# Altium PCB mu100-dit.PcbDoc
Units mm, origin at the board's own origin, x right, y up, seen from the top; angles counter-clockwise.
Board outline 17.9 x 40 mm, 4 copper layers (F.Cu, In1.Cu, In2.Cu, B.Cu); 22 components, 24 nets, 80 pads, 30 vias.
Unrouted connection lines stored in the file: 3.
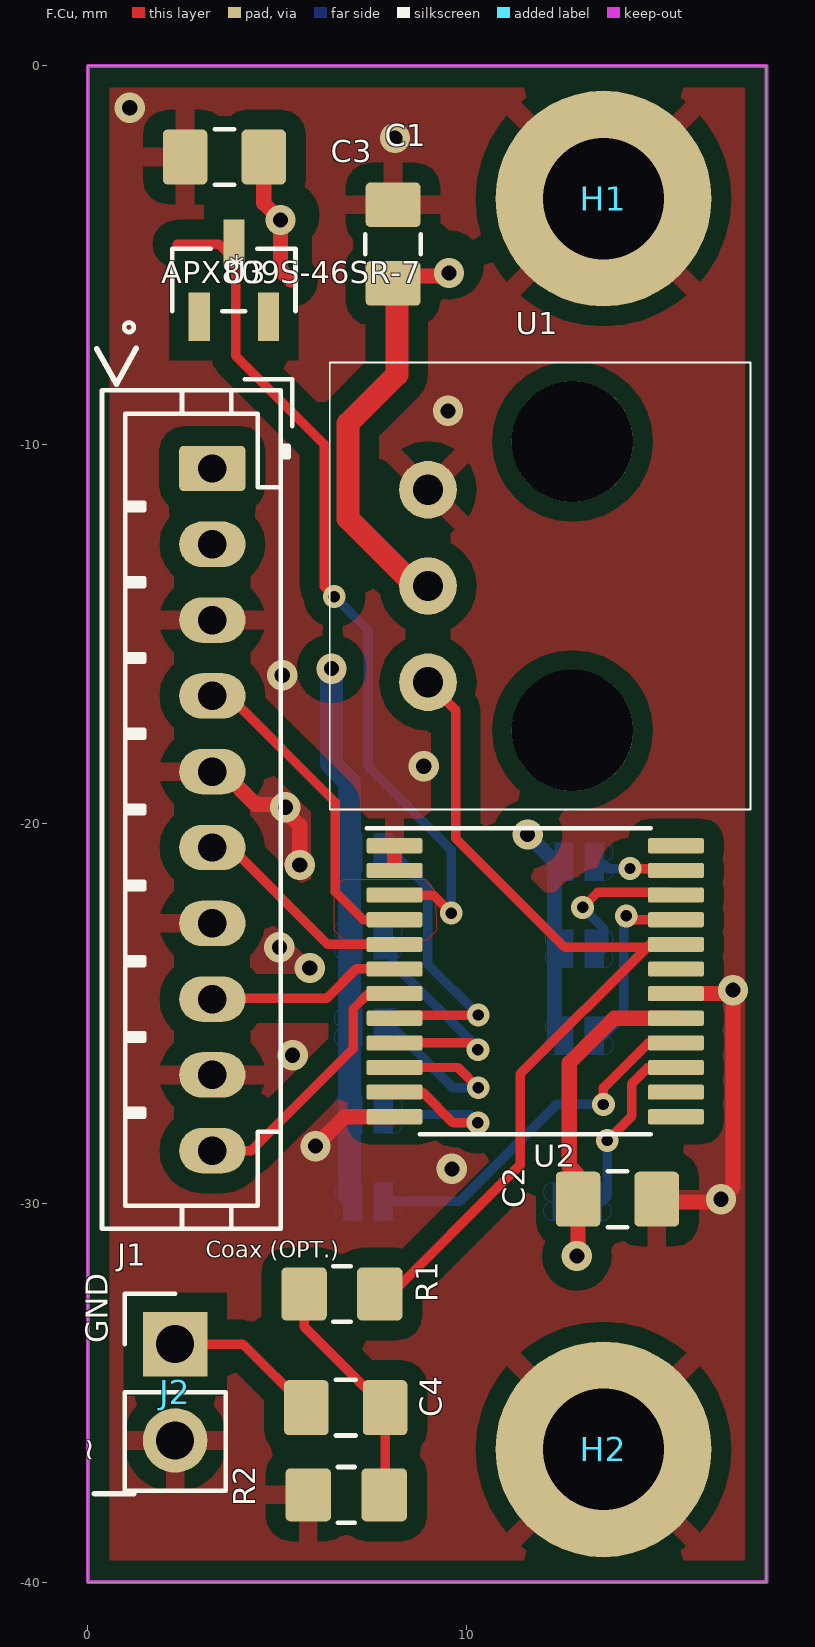
[diagram p0: F.Cu view]
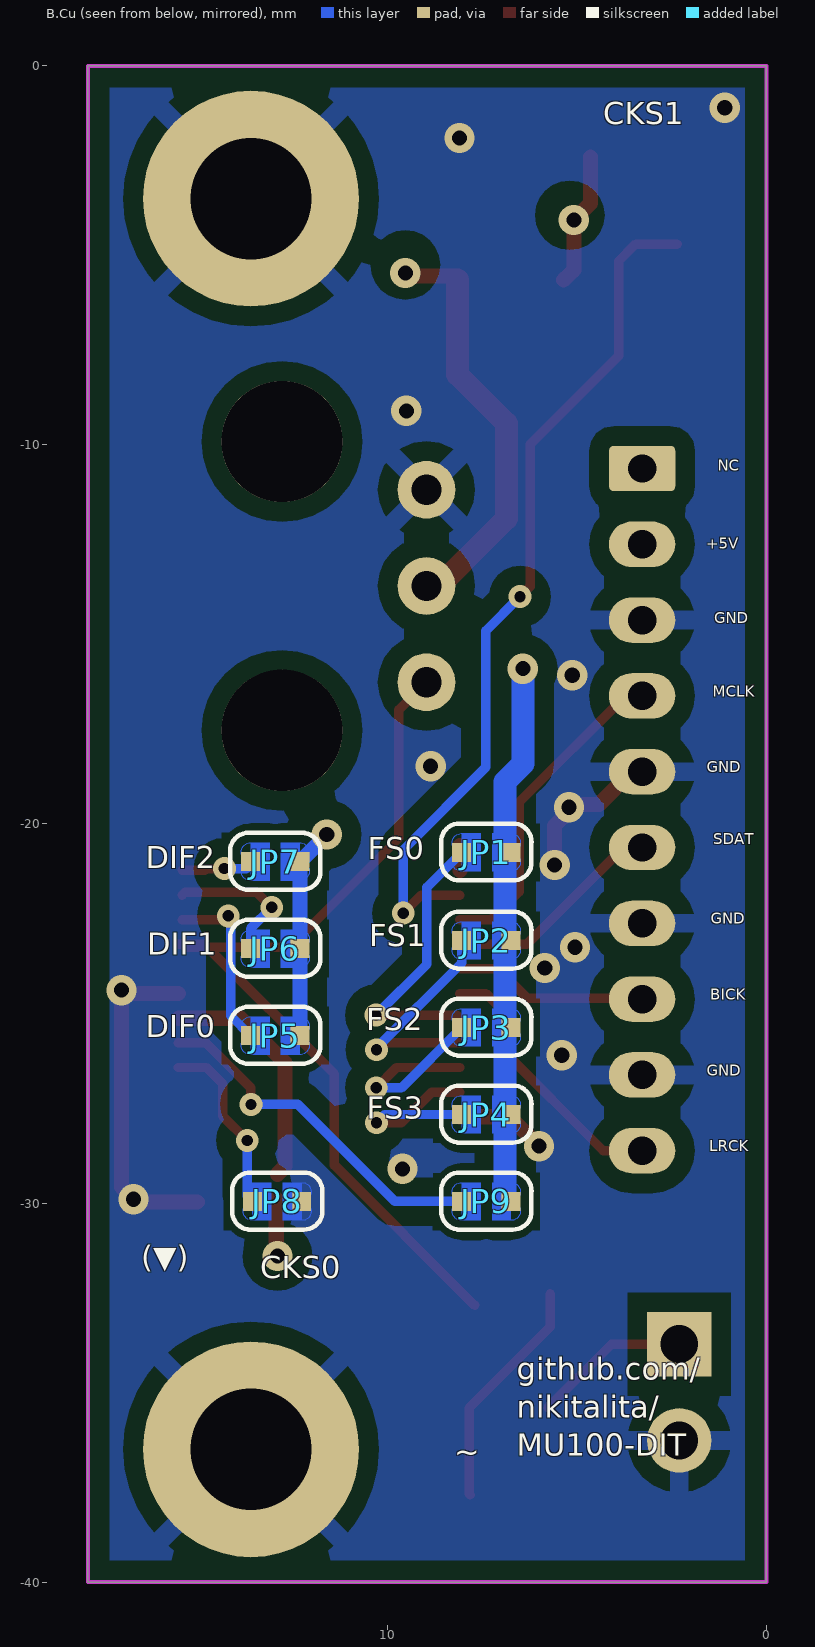
[diagram p1: B.Cu view, seen from below]
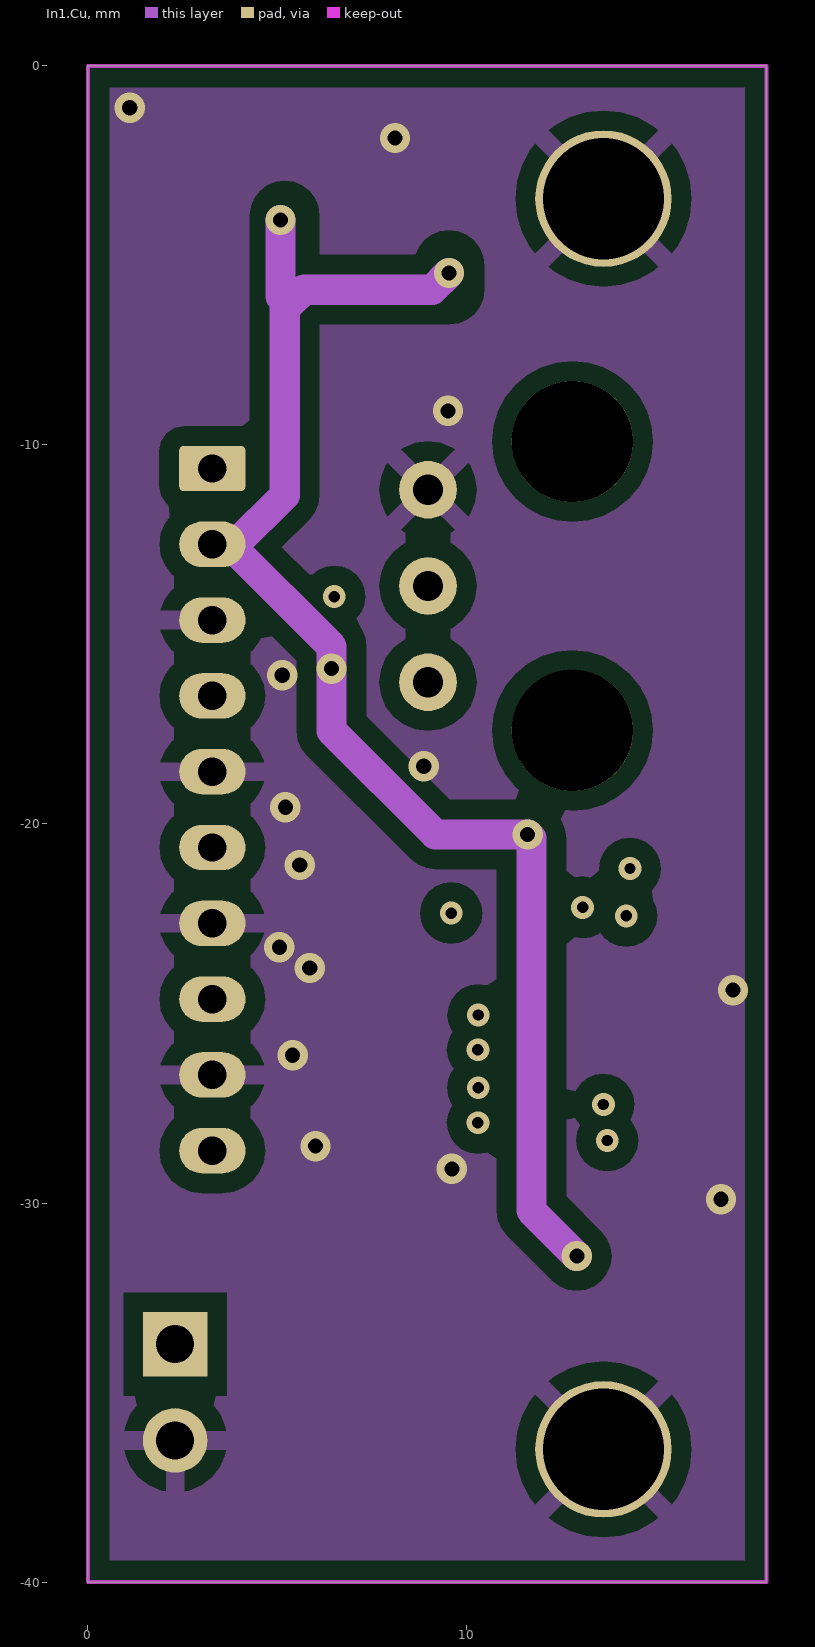
[diagram p2: In1.Cu]
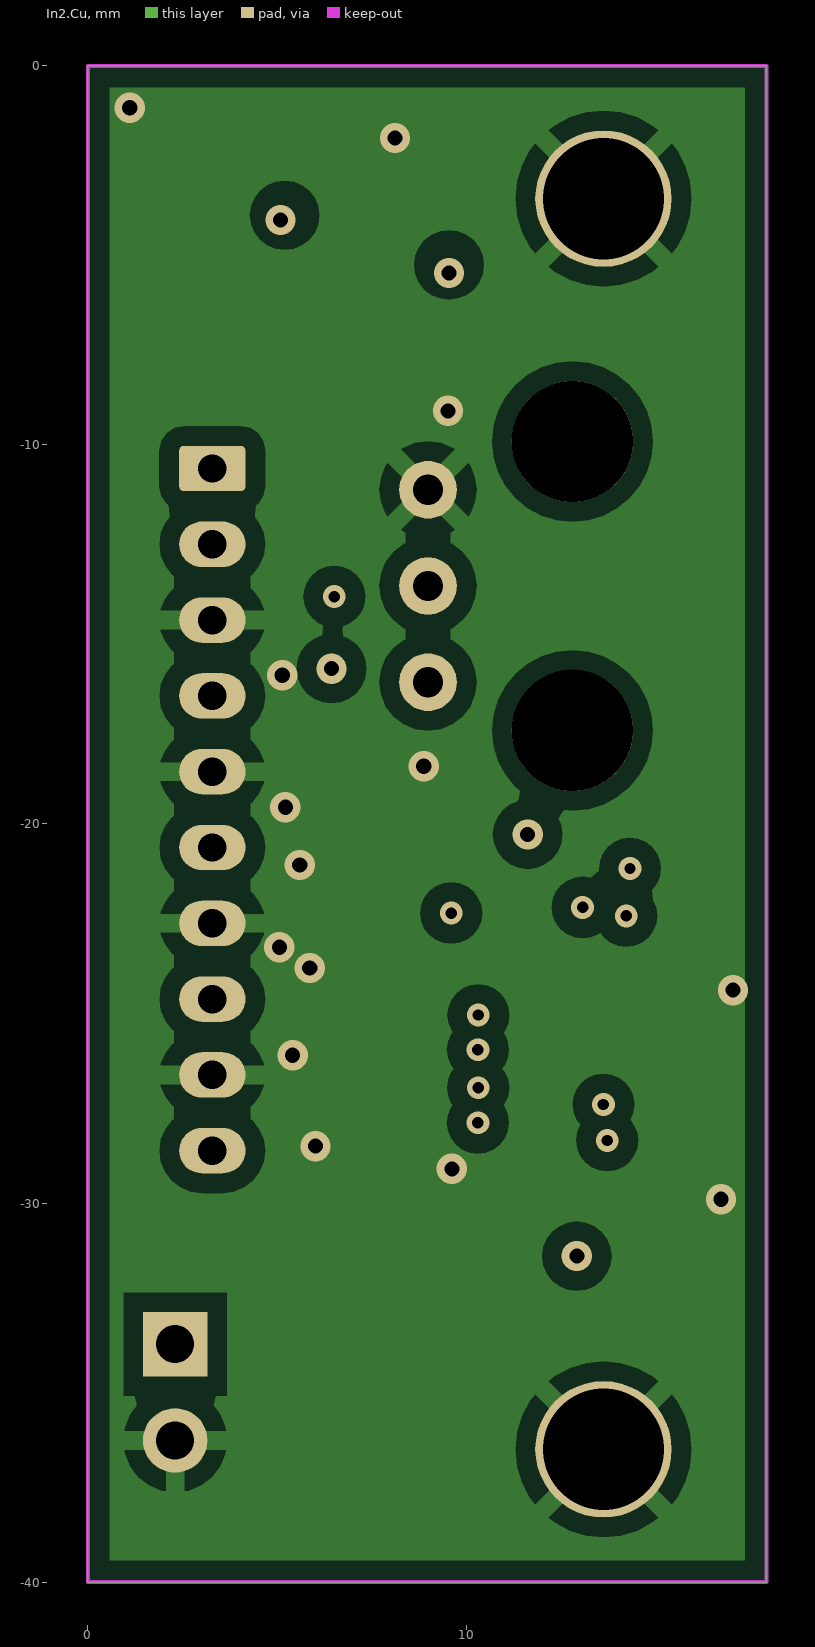
[diagram p3: In2.Cu]

## Layer stack, top to bottom
F.Mask: solder mask 0.0102, Solder Resist, Dk 3.5
F.Cu: signal copper 0.0356
Dielectric 1: dielectric 0.32, FR-4, Dk 4.8
In1.Cu: signal copper 0.0356
Dielectric2: dielectric 0.32, FR-4, Dk 4.8
In2.Cu: signal copper 0.0356
Dielectric3: dielectric 0.32, FR-4, Dk 4.8
B.Cu: signal copper 0.0356
B.Mask: solder mask 0.0102, Solder Resist, Dk 3.5

## Board outline
0,0 0,-40 17.9,-40 17.9,0 0,0

## Design rules (kind name [scope] priority, off if disabled: settings)
Clearance [IsTrack vs IsTrack] p1: gap=0.2 ignorepadtopadclearanceinfootprint=FALSE
Clearance "Clearence 0.5_Polygon" [InNamedPolygon('F.Cu-GND') OR InNamedPolygon('F.Cu-GND-1') OR InNamedPolygon('In1.Cu-GND') OR InNamedPolygon('In2.Cu-GND') OR InNamedPolygon('B.Cu-GND') OR InNamedPolygon('B.Cu-GND-1')] p2: gap=0.5 ignorepadtopadclearanceinfootprint=FALSE
Clearance "Clearence 0.5_PadClass" [InPadClass('Pad Class Clearance 0.5')] p3: gap=0.5 ignorepadtopadclearanceinfootprint=FALSE
Clearance "Clearence 0.2_PadClass" [InPadClass('Pad Class Clearance 0.15')] p4: gap=0.2 ignorepadtopadclearanceinfootprint=FALSE
DiffPairsRouting [All] p1: maxlimit=0.25 minlimit=0.127 mostfreqgap=0.25 toplayer_minwidth=0.127 toplayer_maxwidth=0.4 toplayer_prefwidth=0.25 midlayer1_minwidth=0.127 midlayer1_maxwidth=0.4 midlayer1_prefwidth=0.25 midlayer2_minwidth=0.127 midlayer2_maxwidth=0.4 midlayer2_prefwidth=0.25 bottomlayer_minwidth=0.127 bottomlayer_maxwidth=0.4 bottomlayer_prefwidth=0.25 maxuncoupledlength=12.7
MinimumSolderMaskSliver [All] p1: minsoldermaskwidth=0
PolygonConnect Polygon_B.Cu-GND-1_ConnectDirect [IsNamedPolygon('B.Cu-GND-1') vs IsVia] p1: connectstyle=Direct reliefconductorwidth=0.254 reliefentries=4 polygonreliefangle="90 Angle" airgapwidth=0.254
PolygonConnect Polygon_B.Cu-GND-1_ConnectRelief45 [IsNamedPolygon('B.Cu-GND-1') vs (IsThruPin or IsSMTPin) and (PadShape_AllLayers = 'Round')] p2: connectstyle=Relief reliefconductorwidth=0.508 reliefentries=4 polygonreliefangle="45 Angle" airgapwidth=0.508
PolygonConnect Polygon_B.Cu-GND-1_ConnectRelief90 [IsNamedPolygon('B.Cu-GND-1') vs (IsThruPin or IsSMTPin) and (PadShape_AllLayers <> 'Round')] p3: connectstyle=Relief reliefconductorwidth=0.508 reliefentries=4 polygonreliefangle="90 Angle" airgapwidth=0.508
PolygonConnect Polygon_B.Cu-GND_ConnectDirect [IsNamedPolygon('B.Cu-GND') vs IsVia] p4: connectstyle=Direct reliefconductorwidth=0.254 reliefentries=4 polygonreliefangle="90 Angle" airgapwidth=0.254
PolygonConnect Polygon_B.Cu-GND_ConnectRelief45 [IsNamedPolygon('B.Cu-GND') vs (IsThruPin or IsSMTPin) and (PadShape_AllLayers = 'Round')] p5: connectstyle=Relief reliefconductorwidth=0.508 reliefentries=4 polygonreliefangle="45 Angle" airgapwidth=0.508
PolygonConnect Polygon_B.Cu-GND_ConnectRelief90 [IsNamedPolygon('B.Cu-GND') vs (IsThruPin or IsSMTPin) and (PadShape_AllLayers <> 'Round')] p6: connectstyle=Relief reliefconductorwidth=0.508 reliefentries=4 polygonreliefangle="90 Angle" airgapwidth=0.508
PolygonConnect Polygon_In2.Cu-GND_ConnectDirect [IsNamedPolygon('In2.Cu-GND') vs IsVia] p7: connectstyle=Direct reliefconductorwidth=0.254 reliefentries=4 polygonreliefangle="90 Angle" airgapwidth=0.254
PolygonConnect Polygon_In2.Cu-GND_ConnectRelief45 [IsNamedPolygon('In2.Cu-GND') vs (IsThruPin or IsSMTPin) and (PadShape_AllLayers = 'Round')] p8: connectstyle=Relief reliefconductorwidth=0.508 reliefentries=4 polygonreliefangle="45 Angle" airgapwidth=0.508
PolygonConnect Polygon_In2.Cu-GND_ConnectRelief90 [IsNamedPolygon('In2.Cu-GND') vs (IsThruPin or IsSMTPin) and (PadShape_AllLayers <> 'Round')] p9: connectstyle=Relief reliefconductorwidth=0.508 reliefentries=4 polygonreliefangle="90 Angle" airgapwidth=0.508
PolygonConnect Polygon_In1.Cu-GND_ConnectDirect [IsNamedPolygon('In1.Cu-GND') vs IsVia] p10: connectstyle=Direct reliefconductorwidth=0.254 reliefentries=4 polygonreliefangle="90 Angle" airgapwidth=0.254
PolygonConnect Polygon_In1.Cu-GND_ConnectRelief45 [IsNamedPolygon('In1.Cu-GND') vs (IsThruPin or IsSMTPin) and (PadShape_AllLayers = 'Round')] p11: connectstyle=Relief reliefconductorwidth=0.508 reliefentries=4 polygonreliefangle="45 Angle" airgapwidth=0.508
PolygonConnect Polygon_In1.Cu-GND_ConnectRelief90 [IsNamedPolygon('In1.Cu-GND') vs (IsThruPin or IsSMTPin) and (PadShape_AllLayers <> 'Round')] p12: connectstyle=Relief reliefconductorwidth=0.508 reliefentries=4 polygonreliefangle="90 Angle" airgapwidth=0.508
PolygonConnect Polygon_F.Cu-GND-1_ConnectDirect [IsNamedPolygon('F.Cu-GND-1') vs IsVia] p13: connectstyle=Direct reliefconductorwidth=0.254 reliefentries=4 polygonreliefangle="90 Angle" airgapwidth=0.254
PolygonConnect Polygon_F.Cu-GND-1_ConnectRelief45 [IsNamedPolygon('F.Cu-GND-1') vs (IsThruPin or IsSMTPin) and (PadShape_AllLayers = 'Round')] p14: connectstyle=Relief reliefconductorwidth=0.508 reliefentries=4 polygonreliefangle="45 Angle" airgapwidth=0.508
PolygonConnect Polygon_F.Cu-GND-1_ConnectRelief90 [IsNamedPolygon('F.Cu-GND-1') vs (IsThruPin or IsSMTPin) and (PadShape_AllLayers <> 'Round')] p15: connectstyle=Relief reliefconductorwidth=0.508 reliefentries=4 polygonreliefangle="90 Angle" airgapwidth=0.508
PolygonConnect Polygon_F.Cu-GND_ConnectDirect [IsNamedPolygon('F.Cu-GND')] p16: connectstyle=Direct reliefconductorwidth=0.254 reliefentries=4 polygonreliefangle="90 Angle" airgapwidth=0.254
RoutingCorners [All] p1: cornerstyle=45-Degree minsetback=2.5 maxsetback=2.5
RoutingVias [All] p1: holewidth=0.4 width=0.8 viastyle="Through Hole" minholewidth=0.3 minwidth=0.6 maxholewidth=0.8 maxwidth=1.3
SilkToSilkClearance [All] p1: silktosilkclearance=0
SilkToSolderMaskClearance [IsPad] p1: minsilkscreentomaskgap=0 clearancetoexposedcopper=TRUE
SolderMaskExpansion [All] p1: expansion=0.102 istentingtop=FALSE
Width [All] p1: maxlimit=10 minlimit=0.25 preferedwidth=0.25 midlayer2_maxwidth=0.254 minimp=50.000000 maximp=50.000000 favimp=50.000000
25 further rules are at their usual default settings.

## Classes and differential pairs
pad class "Pad Class Clearance 0.15": JP1-1 JP1-2 JP2-1 JP2-2 JP3-1 JP3-2 JP4-1 JP4-2 JP5-1 JP5-2 JP6-1 JP6-2 JP7-1 JP7-2 JP8-1 JP8-2 JP9-1 JP9-2
pad class "Pad Class Clearance 0.5": U1-Un2

## Components (designator, comment, footprint, x,y, rotation, side; value= is the part's Value field where it differs from the comment)
C1 "0.1u/35V" C_0805_2012Metric_Pad1.18x1.45mm_HandSolder 8.05,-4.7 r270 top
C2 "0.1u/35V" C_0805_2012Metric_Pad1.18x1.45mm_HandSolder 13.97,-29.9 r180 top
C3 "0.1u/35V" C_0805_2012Metric_Pad1.18x1.45mm_HandSolder 3.6,-2.4 r0 top
C4 "0.1u/35V" C_0805_2012Metric_Pad1.18x1.45mm_HandSolder 6.8,-35.4 r180 top
H1 "MountingHole_Pad" MountingHole_3.2mm_M3_ISO7380_Pad_TopBottom 13.6,-3.5 r0 top
H2 "MountingHole_Pad" MountingHole_3.2mm_M3_ISO7380_Pad_TopBottom 13.6,-36.5 r0 top
J1 "Conn_01x10_Female" JST_PH_B10B-PH-K_1x10_P2.00mm_Vertical 3.28,-10.62 r270 top
J2 "Conn_01x02_Male" PinHeader_1x02_P2.54mm_Vertical 2.3,-33.725 r0 top
JP1 "Jumper_NO_Small" SolderJumper-Open_RoundedPad-custom 7.39,-20.74 r180 bottom
JP2 "Jumper_NO_Small" SolderJumper-Open_RoundedPad-custom 7.39,-23.065 r180 bottom
JP3 "Jumper_NO_Small" SolderJumper-Open_RoundedPad-custom 7.39,-25.36 r180 bottom
JP4 "Jumper_NO_Small" SolderJumper-Open_RoundedPad-custom 7.39,-27.655 r180 bottom
JP5 "Jumper_NO_Small" SolderJumper-Open_RoundedPad-custom 12.96,-25.575 r180 bottom
JP6 "Jumper_NO_Small" SolderJumper-Open_RoundedPad-custom 12.96,-23.28 r180 bottom
JP7 "Jumper_NO_Small" SolderJumper-Open_RoundedPad-custom 12.96,-20.985 r180 bottom
JP8 "Jumper_NO_Small" SolderJumper-Open_RoundedPad-custom 12.91,-29.95 r180 bottom
JP9 "Jumper_NO_Small" SolderJumper-Open_RoundedPad-custom 7.39,-29.95 r180 bottom
R1 "330" R_0805_2012Metric_Pad1.20x1.40mm_HandSolder 6.7,-32.4 r180 top
R2 "100" R_0805_2012Metric_Pad1.20x1.40mm_HandSolder 6.814,-37.7 r0 top
U1 "TOTX-177L" Toshiba_TOTX177 11.34,-9.9 r270 top
U2 "AK4103A" TSSOP-24_6.1x7.8mm_P0.65mm 11.8,-24.15 r0 top
U3 "APX809S-46SR-7" APX809S-46SA-7 3.85,-5.65 r0 top

## Footprints (in the part's own frame and the unit in brackets; to place one, negate y for a bottom-side part, rotate by r counter-clockwise, add the part's x,y. Pads: shape width x height; smd on the part's side, far side on the other; paste and mask are expansions set on the pad)
APX809S-46SA-7 [mil]
  rect 22x50 smd mask+0: 1(-36.02,-38) 2(36.02,-38) 3(0,38)
  silkscreen extent -114,-54 64,32
C_0805_2012Metric_Pad1.18x1.45mm_HandSolder [mm]
  rrect21% 1.175x1.45 smd mask+0: 1(-1.038,0) 2(1.038,0)
  silkscreen extent -0.26,-0.73 0.26,0.73
JST_PH_B10B-PH-K_1x10_P2.00mm_Vertical [mm]
  rrect21% 1.2x1.75 hole 0.75 paste-1.75 mask+0: 1(0,0)
  rrect100% 1.2x1.75 hole 0.75 paste-1.75 mask+0: 2(2,0) 3(4,0) 4(6,0) 5(8,0) 6(10,0) 7(12,0) 8(14,0) 9(16,0) 10(18,0)
  silkscreen extent -2.36,-2.91 20.06,2.11
MountingHole_3.2mm_M3_ISO7380_Pad_TopBottom [mm]
  round 5.7 smd paste-5.7 mask+0: 1(0,0)
  round 3.6 hole 3.2 paste-3.6 mask+0: 1(0,0)
  round 5.7 smd far side paste-5.7 mask+0: 1(0,0)
PinHeader_1x02_P2.54mm_Vertical [mm]
  rect 1.7x1.7 hole 1 paste-1.7 mask+0: 1(0,0)
  rrect100% 1.7x1.7 hole 1 paste-1.7 mask+0: 2(0,-2.54)
  silkscreen extent -1.33,-3.87 1.33,1.33
R_0805_2012Metric_Pad1.20x1.40mm_HandSolder [mm]
  rrect21% 1.2x1.4 smd mask+0: 1(-1,0) 2(1,0)
  silkscreen extent -0.23,-0.73 0.23,0.73
SolderJumper-Open_RoundedPad-custom [mm]
  rect 0.5x0.5 smd paste-0.5 mask+0: 1(0.65,-0.01) 2(-0.65,-0.01)
  F.Cu circle w0: c-0.65,0.24 r0.25
  F.Cu circle w0: c-0.65,-0.26 r0.25
  F.Cu circle w0: c0.65,-0.26 r0.25
  F.Cu circle w0: c0.65,0.24 r0.25
  F.Cu region: -0.65,-0.51 -0.15,-0.51 -0.15,0.49 -0.65,0.49
  F.Cu region: 0.15,-0.51 0.65,-0.51 0.65,0.49 0.15,0.49
  silkscreen extent -1.19,-0.75 1.19,0.75
Toshiba_TOTX177 [mm]
  round 1.524 hole 0.8 paste-1.524 mask+0: 1(1.28,-2.37) 2(3.82,-2.37) 3(6.36,-2.37)
  round 3.2 hole 3.2 paste-3.2 mask+0: Un1(0.01,1.44) Un2(7.63,1.44)
  silkscreen extent -2.08,-4.96 9.72,6.14
TSSOP-24_6.1x7.8mm_P0.65mm [mm]
  rrect25% 1.475x0.4 smd mask+0: 1(-3.712,3.575) 2(-3.712,2.925) 3(-3.712,2.275) 4(-3.712,1.625) 5(-3.712,0.975) 6(-3.712,0.325) 7(-3.712,-0.325) 8(-3.712,-0.975) 9(-3.712,-1.625) 10(-3.712,-2.275) 11(-3.712,-2.925) 12(-3.712,-3.575) 13(3.712,-3.575) 14(3.712,-2.925) 15(3.712,-2.275) 16(3.712,-1.625) 17(3.712,-0.975) 18(3.712,-0.325) 19(3.712,0.325) 20(3.712,0.975) 21(3.712,1.625) 22(3.712,2.275) 23(3.712,2.925) 24(3.712,3.575)
  silkscreen extent -4.45,-4.04 3.05,4.04

## Part data
C1 C2 C3 C4: library part C_0805_2012Metric_Pad1.18x1.45mm_HandSolder, "Capacitor SMD 0805 (2012 Metric), square (rectangular) end terminal, IPC_7351 nominal with elongated pad for handsoldering. (Body size source: IPC-SM-782 page 76, https://www.pcb-3d.com/wordpress/wp-content/uploads/ipc-sm-782a_amendment_1_and_2.pdf, https://docs.google.com/spreadsheets/d/1BsfQQcO9C6DZCsRaXUlFlo91Tg2WpOkGARC1WS5S8t0/edit?usp=sharing), generated with kicad-footprint-generator", Sheetfile=mu100-dit.kicad_sch
H1 H2: library part MountingHole_3.2mm_M3_ISO7380_Pad_TopBottom, "Mounting Hole 3.2mm, M3, ISO7380", Sheetfile=mu100-dit.kicad_sch
J1: library part JST_PH_B10B-PH-K_1x10_P2.00mm_Vertical, "JST PH series connector, B10B-PH-K (http://www.jst-mfg.com/product/pdf/eng/ePH.pdf), generated with kicad-footprint-generator", Sheetfile=mu100-dit.kicad_sch
J2: library part PinHeader_1x02_P2.54mm_Vertical, "Through hole straight pin header, 1x02, 2.54mm pitch, single row", Sheetfile=mu100-dit.kicad_sch
JP1 JP2 JP3 JP4 JP5 JP6 JP7 JP8 JP9: library part SolderJumper-Open_RoundedPad-custom, "SMD Solder Jumper, 1x1.5mm, rounded Pads, 0.3mm gap, open", Sheetfile=mu100-dit.kicad_sch
R1 R2: library part R_0805_2012Metric_Pad1.20x1.40mm_HandSolder, "Resistor SMD 0805 (2012 Metric), square (rectangular) end terminal, IPC_7351 nominal with elongated pad for handsoldering. (Body size source: IPC-SM-782 page 72, https://www.pcb-3d.com/wordpress/wp-content/uploads/ipc-sm-782a_amendment_1_and_2.pdf), generated with kicad-footprint-generator", Sheetfile=mu100-dit.kicad_sch
U1: library part Toshiba_TOTX177, "Fiberoptic Reciver, RX, Toshiba, Toslink, TORX170, TORX173, TORX193, TORX194", Sheetfile=mu100-dit.kicad_sch
U2: library part TSSOP-24_6.1x7.8mm_P0.65mm, "TSSOP, 24 Pin (JEDEC MO-153 Var DA https://www.jedec.org/document_search?search_api_views_fulltext=MO-153), generated with kicad-footprint-generator ipc_gullwing_generator.py", Sheetfile=mu100-dit.kicad_sch
U3: library part APX809S-46SA-7, Sheetfile=mu100-dit.kicad_sch

## Via types
v1: diameter 0.8, hole 0.4, F.Cu to B.Cu, tented both sides, 19 vias
v2: diameter 0.6, hole 0.3, F.Cu to B.Cu, tented both sides, 11 vias

## Nets (pads, with @x,y where several pads share a name; then routed paths per layer and width w, separated by ;. In a path a pad name is that pad's centre, name@x,y a point inside that pad or via, vN(x,y) a via of type N, cw(c..) or ccw(c..) an arc to the next point about the centre after c; other vN are vias at no path point)
+5V: C1.2 C2.2 C3.2 J1.2 JP1.1 JP2.1 JP3.1 JP4.1 JP5.1 JP6.1 JP7.1 JP9.1 U1.2 U2.17 U3.3 | length 81.2
  F.Cu w0.4: C3.2 4.638,-3.622 v1(5.08,-4.064) 5.08,-5.38 5.188,-5.487 5.35,-5.65 ; C1.2@8.15,-5.638 8.25,-5.538 9.448,-5.538 v1(9.525,-5.461) ; v1(12.9,-31.4) 12.933,-31.368 C2.2 ; C2.2@12.9,-29.24 12.7,-29.04 12.7,-26.3 13.875,-25.125 U2.17
  F.Cu w0.6: C1.2@8.15,-5.638 8.15,-8.142 6.858,-9.434 6.858,-11.938 8.64,-13.72 U1.2
  In1.Cu w0.8: v1(5.08,-4.064) 5.08,-6.08 5.188,-6.188 ; v1(9.525,-5.461) 9.086,-5.9 5.7,-5.9 5.3,-6.3 5.188,-6.188 ; v1(12.9,-31.4) 11.7,-30.2 11.7,-20.375 v1(11.6,-20.275) 9.161,-20.275 6.425,-17.539 v1(6.425,-15.9) 6.425,-15.315 3.73,-12.62 J1.2 3.89,-12.62 5.188,-11.323 5.188,-6.188
  B.Cu w0.4: v1(11.6,-20.275) 11.6,-20.285 JP7.1 JP5.1
  B.Cu w0.6: v1(6.425,-15.9) 6.425,-18.408 6.9,-18.883 JP9.1@6.9,-29.8
BICK: J1.8 U2.6 | length 5.1
  F.Cu w0.25: J1.8 3.3,-24.6 6.301,-24.6 7.076,-23.825 U2.6
CKS0: JP8.2 U2.15 | length 4.8
  F.Cu w0.25: v2(13.7,-28.35) 14.35,-27.7 14.35,-26.85 14.775,-26.425 U2.15
  B.Cu w0.25: JP8.2 13.7,-29.82 v2(13.7,-28.35)
CKS1: JP9.2 U2.16 | length 9.5
  F.Cu w0.25: v2(13.6,-27.4) 13.6,-26.965 14.789,-25.775 U2.16
  B.Cu w0.25: JP9.2 9.8,-29.96 12.36,-27.4 v2(13.6,-27.4)
DIF0: JP5.2 U2.21 | length 4.7
  F.Cu w0.25: v2(14.2,-22.425) 14.3,-22.525 U2.21@15.413,-22.525
  B.Cu w0.25: JP5.2 14.135,-25.06 14.135,-22.49 v2(14.2,-22.425)
DIF1: JP6.2 U2.22 | length 3.9
  F.Cu w0.25: v2(13.05,-22.2) 13.45,-21.8 15.338,-21.8 U2.22@15.413,-21.875
  B.Cu w0.25: v2(13.05,-22.2) 13.61,-22.76 JP6.2
DIF2: JP7.2 U2.23 | length 1.9
  F.Cu w0.25: v2(14.3,-21.175) 14.775,-21.175 14.825,-21.225 U2.23@15.413,-21.225
  B.Cu w0.25: JP7.2@13.61,-21.06 13.725,-21.175 v2(14.3,-21.175)
FS0: JP1.2 U2.8 | length 7.5
  F.Cu w0.25: U2.8 8.173,-25.04 v2(10.3,-25.04)
  B.Cu w0.25: JP1.2 8.959,-21.669 8.959,-23.699 v2(10.3,-25.04)
FS1: JP2.2 U2.9 | length 6.1
  F.Cu w0.25: U2.9 10.108,-25.775 v2(10.287,-25.954)
  B.Cu w0.25: JP2.2 8.04,-23.663 10.287,-25.91 v2(10.287,-25.954)
FS2: JP3.2 U2.10 | length 5.3
  F.Cu w0.25: U2.10 9.758,-26.425 v2(10.295,-26.962)
  B.Cu w0.25: JP3.2 9.632,-26.962 v2(10.295,-26.962)
FS3: JP4.2 U2.11 | length 4.9
  F.Cu w0.25: U2.11 8.824,-27.075 9.634,-27.885 v2(10.287,-27.885)
  B.Cu w0.25: JP4.2 10.067,-27.665 v2(10.287,-27.885)
GND: C1.1 C2.1 C3.1 H1.1 H2.1 J1.3 J1.5 J1.7 J1.9 J2.2 JP8.1 R2.1 U1.1 U2.1 U2.2 U2.12 U2.18 U3.2 | length 16
  F.Cu w0.4: J1.5 3.555,-18.62 4.416,-19.481 5.13,-19.481 v1(5.207,-19.558) 5.207,-19.666 5.588,-20.047 v1(5.588,-21.082) ; v1(6.001,-28.5) 6.776,-27.725 U2.12 ; U2.2 U2.1 ; C2.1@15.008,-29.972 16.628,-29.972 17.018,-29.582 v1(17.018,-24.384) 16.927,-24.475 U2.18
  other v1: 16.7,-29.9 9.6,-29.1 5.4,-26.1 5.85,-23.8 5.05,-23.25 8.859,-18.475 5.125,-16.075 9.5,-9.1 8.1,-1.9 1.1,-1.1
LRCK: J1.10 U2.7 | length 7.2
  F.Cu w0.25: J1.10@3.28,-28.595 J1.10 4.305,-28.62 7,-25.925 7,-24.875 7.4,-24.475 U2.7
MCLK: J1.4 U2.4 | length 8.6
  F.Cu w0.25: J1.4 3.72,-16.62 6.525,-19.425 6.525,-21.787 7.262,-22.525 U2.4
Net-(C4-Pad1): C4.1 R1.2 R2.2 | length 6.2
  F.Cu w0.25: R1.2 5.7,-33.263 C4.1 7.838,-37.677 R2.2
Net-(C4-Pad2): C4.2 J2.1 | length 4.2
  F.Cu w0.25: J2.1 4.088,-33.725 C4.2
RESET: U2.3 U3.1 | length 23
  F.Cu w0.25: 2.35,-4.7 3.45,-4.7 3.9,-5.15 3.9,-7.65 6.233,-9.983 6.233,-13.733 v2(6.5,-14) ; U2.3 9.109,-21.875 v2(9.584,-22.35)
  B.Cu w0.25: v2(6.5,-14) 7.4,-14.9 7.4,-18.5 9.584,-20.684 v2(9.584,-22.35)
SDAT: J1.6 U2.5 | length 5.9
  F.Cu w0.25: J1.6 3.772,-20.62 6.327,-23.175 U2.5
TXP: R1.1 U1.3 U2.20 | length 24.5
  F.Cu w0.25: R1.1@7.7,-32.7 11.4,-29 11.4,-26.6 14.825,-23.175 U2.20 ; U1.3 9.7,-16.99 9.7,-20.375 12.575,-23.25 15.338,-23.25 U2.20@15.413,-23.175
unconnected-(J1-Pad1): J1.1
unconnected-(U2-Pad13): U2.13
unconnected-(U2-Pad14): U2.14
unconnected-(U2-Pad19): U2.19
unconnected-(U2-Pad24): U2.24
pads on no net: U1.Un1 U1.Un2

## Polygon pours and split planes (outlines as drawn)
GND on F.Cu "F.Cu-GND-1" (solid, remove dead copper, pour order 1): 17.866,-39.902 -0.028,-39.902 -0.028,-0.048 17.866,-0.048
GND on F.Cu "F.Cu-GND" (solid, remove dead copper, pour order 0): 9.198,-22.81 8.944,-23.064 6.752,-23.064 6.498,-22.81 6.498,-21.718 6.752,-21.464 8.9,-21.464 9.151,-21.757
GND on In1.Cu "In1.Cu-GND" (solid, remove dead copper, pour order 2): 17.866,-39.902 -0.028,-39.902 -0.028,-0.048 17.866,-0.048
GND on In2.Cu "In2.Cu-GND" (solid, remove dead copper, pour order 3): 17.866,-39.902 -0.028,-39.902 -0.028,-0.048 17.866,-0.048
GND on B.Cu "B.Cu-GND-1" (solid, remove dead copper, pour order 5): 17.899,-0.043 -0.093,-0.043 -0.096,-39.913 17.896,-39.894
GND on B.Cu "B.Cu-GND" (solid, remove dead copper, pour order 4): 17.866,-39.902 -0.028,-39.902 -0.028,-0.048 17.866,-0.048

## Keep-outs
Edge.Cuts:
  lines w0.1: 0,-40 17.9,-40 ; 0,-40 0,0 ; 0,-40 17.9,-40 ; 0,-40 0,0 ; 0,0 17.9,0 ; 0,0 17.9,0 ; 17.9,-40 17.9,0 ; 17.9,-40 17.9,0

## Silkscreen, mask and mechanical layers (free items; w line width, h text height)
F.SilkS:
  lines w0.15: 0.17,-37.672 1.21,-37.672 ; 0.23,-7.46 0.75,-8.39 ; 0.75,-8.385 1.27,-7.455
  text "Coax (OPT.)" at 3.11,-31.584 h0.75
  text "GND" at 0.724,-33.705 h1 r90
  text "~" at 0.499,-36.85 h1 r90
B.SilkS:
  text "CKS1" at 4.306,-1.734 h1
  text "NC" at 1.279,-10.79 h0.5
  text "+5V" at 1.589,-12.841 h0.5
  text "GND" at 1.374,-14.812 h0.5
  text "MCLK" at 1.422,-16.742 h0.5
  text "GND" at 1.574,-18.742 h0.5
  text "SDAT" at 1.405,-20.642 h0.5
  text "FS0" at 10.523,-21.126 h1
  text "DIF2" at 16.376,-21.362 h1
  text "GND" at 1.474,-22.742 h0.5
  text "FS1" at 10.48,-23.424 h1
  text "DIF1" at 16.34,-23.645 h1
  text "BICK" at 1.482,-24.742 h0.5
  text "FS2" at 10.556,-25.634 h1
  text "DIF0" at 16.382,-25.828 h1
  text "GND" at 1.574,-26.742 h0.5
  text "FS3" at 10.539,-27.976 h1
  text "LRCK" at 1.502,-28.742 h0.5
  text "(▼)" at 16.488,-31.904 h1
  text "CKS0" at 13.354,-32.186 h1
  text "github.com/ / nikitalita/ / MU100-DIT" at 6.584,-36.864 h1
  text "~" at 8.239,-37.054 h1

## Text inside footprints (layer, text, board x,y; h text height)
U3: F.Fab "*" at 3.728,-5.767 h1; F.SilkS "*" at 3.728,-5.767 h1; Cmts.User "Copyright 2021 Accelerated Designs. All rights reserved." at 2.989,-5.699 h0.13